# EAGLE board attiny85 (EAGLE 9.6.2)
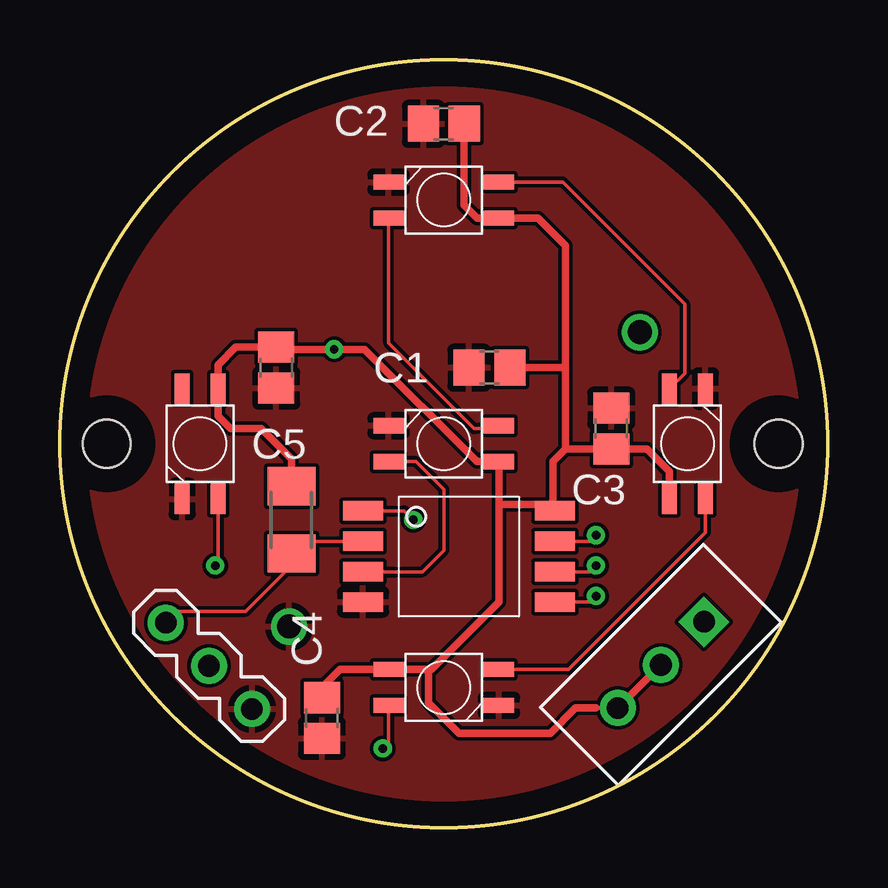
[diagram p0: board, top side]
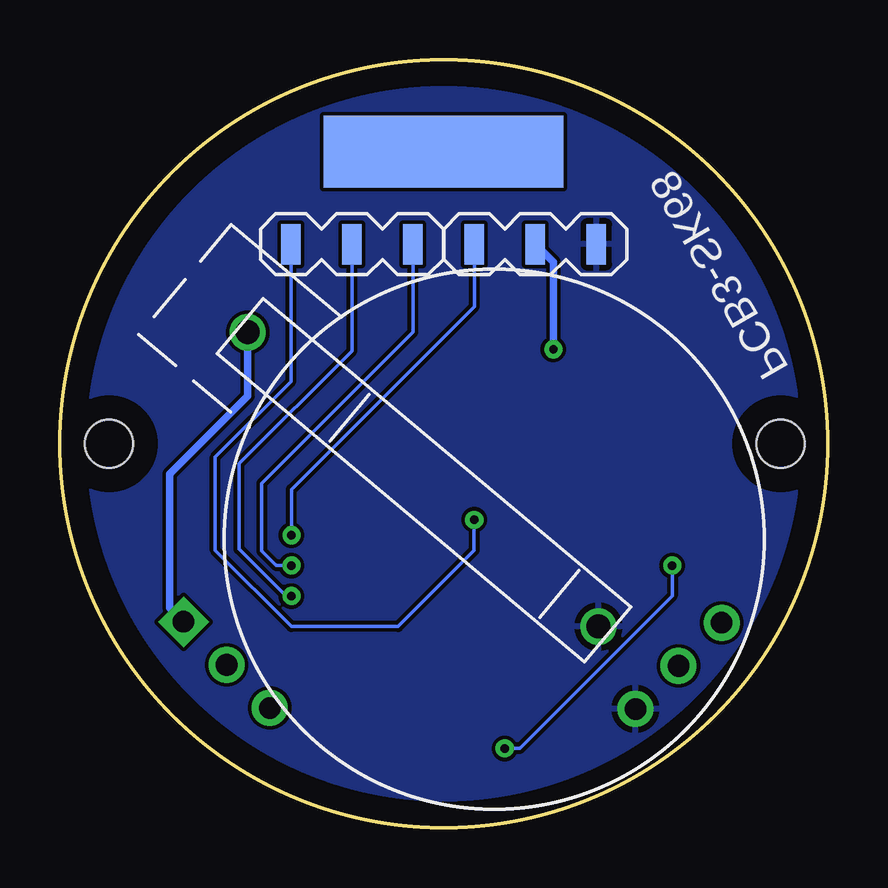
[diagram p1: board, bottom side, seen from below]

Size 32 x 32 mm. Coordinates in mm from the lower left corner, seen from the top.
Outline: circle at 16,16 radius 16
Copper layers (1*16): Top 0.035mm / dielectric 1.5mm / Bottom 0.035mm
Design rules "default": minimum track width 6mil, minimum drill 0.35mm, track to track 6mil, track to pad 6mil, pad to pad 6mil, via to via 6mil, smd to smd 6mil, copper to edge 40mil, drill to drill 6mil, minimum pad ring 10mil, minimum via ring 8mil, stop-mask expansion 4mil, vias tented up to drill 0mil, thermal gap 10mil
Holes 2 mm at 1.95,16 29.95,16

## Footprints (pad centres in the part's own frame; a part is rotated, then mirrored left to right if it is on the bottom)
ATTINY85-20SUR = smd 1.676 x 0.813: P1 -4,1.905; P2 -4,0.635; P3 -4,-0.635; P4 -4,-1.905; P5 4,-1.905; P6 4,-0.635; P7 4,0.635; P8 4,1.905
BAT-CR2032-2 = drill 1: BAT+ 0,13.158; BAT- 0,-5.93
C2012 = smd 1.3 x 1.5: 1 -0.85,0; 2 0.85,0
PINHEAD-MA03-2 = smd 0.813 x 1.676: 1 -1.27,0; 2 1.27,0; 3 3.81,0
PINHEAD-MA03-1 = drill 0.9 pad 1.5: 1 -1.27,0; 2 1.27,0; 3 3.81,0
PAD-10X3 = smd 10 x 3: P$1 0,0
M3216 = smd 1.6 x 2: 1 -1.4,0; 2 1.4,0
SK6812MINI-E = smd 1.27 x 0.635: DIN 2.3,0.75; DOUT -2.3,-0.75; GND 2.3,-0.75; VDD -2.3,0.75
SW3-1 = drill 0.9 pad 1.5 square: 1 -1.27,0 | drill 0.9 pad 1.5: 2 1.27,0; 3 3.81,0

## Placement (x,y rotation side)
ATTINY85-1  ATTINY85  [ATTINY85-20SUR]  16.63,11.3 0 top
BAT1  [BAT-CR2032-2]  14.09,12.19 50 bottom
C1  [C2012]  17.9,19.18 180 top
C2  [C2012]  16,29.33 180 top
C3  [C2012]  22.98,16.63 90 top
C4  [C2012]  10.92,4.57 270 top
C5  [C2012]  9.01,19.18 270 top
H1  [PINHEAD-MA03-2]  21.1,24.31 0 bottom
H2  [PINHEAD-MA03-2]  13.45,24.31 0 bottom
H3  [PINHEAD-MA03-1]  7.11,5.84 135 top
PAD33  PAD_10X3  [PAD-10X3]  16,28.18 0 bottom
R1  10K  [M3216]  9.65,12.82 90 top
SK1  SK6812MINI-E  [SK6812MINI-E]  16,16 180 top
SK2  SK6812MINI-E  [SK6812MINI-E]  16,26.16 180 top
SK3  SK6812MINI-E  [SK6812MINI-E]  26.16,16 90 top
SK4  SK6812MINI-E  [SK6812MINI-E]  16,5.84 0 top
SK5  SK6812MINI-E  [SK6812MINI-E]  5.84,16 270 top
SW2  POWER  [SW3-1]  25.95,7.68 225 top

## Library data of the parts
ATTINY85-1 BAT1 H1 H2 PAD33 SK1-SK5 = ytani1
C1-C5 = rcl; SPICEPREFIX: C
H3 = ytani1; OC_FARNELL: unknown; OC_NEWARK: unknown
R1 = rcl; SPICEPREFIX: R
SW2 = ytani1; MF: HiLetgo; URL_AMAZON: https://www.amazon.co.jp/gp/product/B01LYVYQNO/

## Nets
+3V3: BAT1.BAT+ SW2.1
BAT+: ATTINY85-1.P8 C1.1 C2.1 C3.1 C4.1 C5.1 H2.2 R1.2 SK1.VDD SK2.VDD SK3.VDD SK4.VDD SK5.VDD SW2.2 SW2.3
GND: ATTINY85-1.P4 BAT1.BAT- C1.2 C2.2 C3.2 C4.2 C5.2 H2.3 H3.1 SK1.GND SK2.GND SK3.GND SK4.GND SK5.GND
N$1: ATTINY85-1.P3 SK1.DIN
N$2: ATTINY85-1.P7 H2.1
N$3: ATTINY85-1.P6 H1.3
N$4: ATTINY85-1.P1 H1.1
N$5: ATTINY85-1.P5 H1.2
N$6: SK1.DOUT SK2.DIN
N$7: SK2.DOUT SK3.DIN
N$8: SK3.DOUT SK4.DIN
N$9: SK4.DOUT SK5.DIN
PB3: ATTINY85-1.P2 H3.3 R1.1

## Tracks (layer width: path | path; a pad name or v marks a point on that pad's centre or on a via)
+3V3
  Bottom 0.305: SW2.1 27.43,9.16 27.43,14.73 24.18,17.98 BAT1.BAT+
BAT+  (via drill 0.35)
  Top 0.152: 10.92,5.84 C4.1 | 15.36,6.59 15.48,6.59 | 9.1,19.94 C5.1 | 20.55,13.29 ATTINY85-1.P8 20.38,13.46 | SW2.3 22.35,4.99
  Top 0.305: 21.08,15.79 C3.1 24.47,15.79 25.41,14.84 SK3.VDD | 10.92,5.84 11.67,6.59 SK4.VDD 15.36,6.59 15.36,5.21 16.63,3.93 20.45,3.93 21.5,4.99 22.35,4.99 | C5.1 7.32,20.02 6.59,19.29 SK5.VDD 6.59,17.15 7.11,16.63 8.38,16.63 9.65,15.36 R1.2 | 18.3,13.46 18.3,9.41 15.48,6.59 | 18.3,13.46 SK1.VDD 17.38,15.25 12.7,19.94 v11.43,19.94 9.1,19.94 | SW2.3 SW2.2 | 21.08,19.18 21.08,24.25 19.93,25.41 SK2.VDD 17.38,25.41 16.85,25.95 C2.1 | 21.08,19.18 21.08,15.79 | C1.1 21.08,19.18 | 20.55,13.29 20.55,15.26 21.08,15.79 | 20.38,13.46 18.3,13.46
  Bottom 0.305: H2.2 11.43,23.56 v11.43,19.94
GND
  pour Top: -0.51,32.51 32.51,32.51 32.51,-0.51 -0.51,-0.51
  pour Bottom: 5.84,33.14 25.52,33.14 33.14,25.52 33.14,9.01 22.98,-1.15 7.11,-1.15 -1.15,7.11 -1.15,26.16
N$1
  Top 0.152: ATTINY85-1.P3 15.11,10.67 16,11.55 16,14.09 14.84,15.25 SK1.DIN
N$2  (via drill 0.35)
  Top 0.152: ATTINY85-1.P7 22.1,11.94 v22.35,12.19
  Bottom 0.152: v22.35,12.19 22.35,14.09 14.72,21.72 H2.1
N$3  (via drill 0.35)
  Top 0.152: ATTINY85-1.P6 22.1,10.67 v22.35,10.92
  Bottom 0.152: v22.35,10.92 22.98,10.92 23.59,11.53 23.59,14.35 17.29,20.65 H1.3
N$4  (via drill 0.35)
  Top 0.152: ATTINY85-1.P1 14.35,13.21 v14.73,12.82
  Bottom 0.152: v14.73,12.82 14.73,11.55 17.9,8.38 22.35,8.38 25.52,11.55 25.52,15.45 22.37,18.6 H1.1
N$5  (via drill 0.35)
  Top 0.152: ATTINY85-1.P5 22.1,9.4 v22.35,9.65
  Bottom 0.152: v22.35,9.65 22.57,9.65 24.53,11.61 24.53,15.17 19.83,19.87 H1.2
N$6
  Top 0.152: SK1.DOUT 18.18,16.63 17.27,16.63 13.7,20.2 SK2.DIN
N$7
  Top 0.152: SK3.DIN 26.04,18.93 26.04,21.83 20.96,26.91 SK2.DOUT
N$8
  Top 0.152: SK3.DOUT 26.91,12.3 21.2,6.59 SK4.DIN
N$9  (via drill 0.35)
  Top 0.152: SK5.DIN 6.59,11.04 v6.47,10.92 | SK4.DOUT 13.7,3.54 v13.46,3.3
  Bottom 0.152: v6.47,10.92 6.47,9.65 12.82,3.3 v13.46,3.3
PB3
  Top 0.152: H3.3 4.9,9.01 7.74,9.01 9.65,10.92 R1.1 10.16,11.94 ATTINY85-1.P2

## Text on the board
bPlace: PCB3-SK68